# EAGLE board FinalSolarChargeSystem (EAGLE 9.3.1)
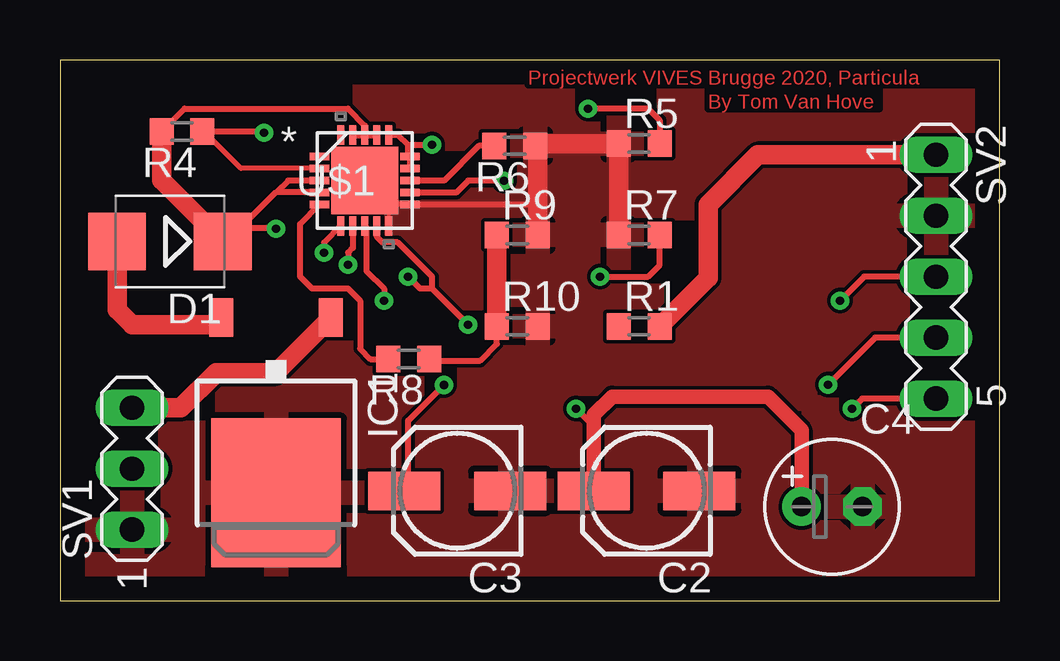
[diagram p0: board, top side]
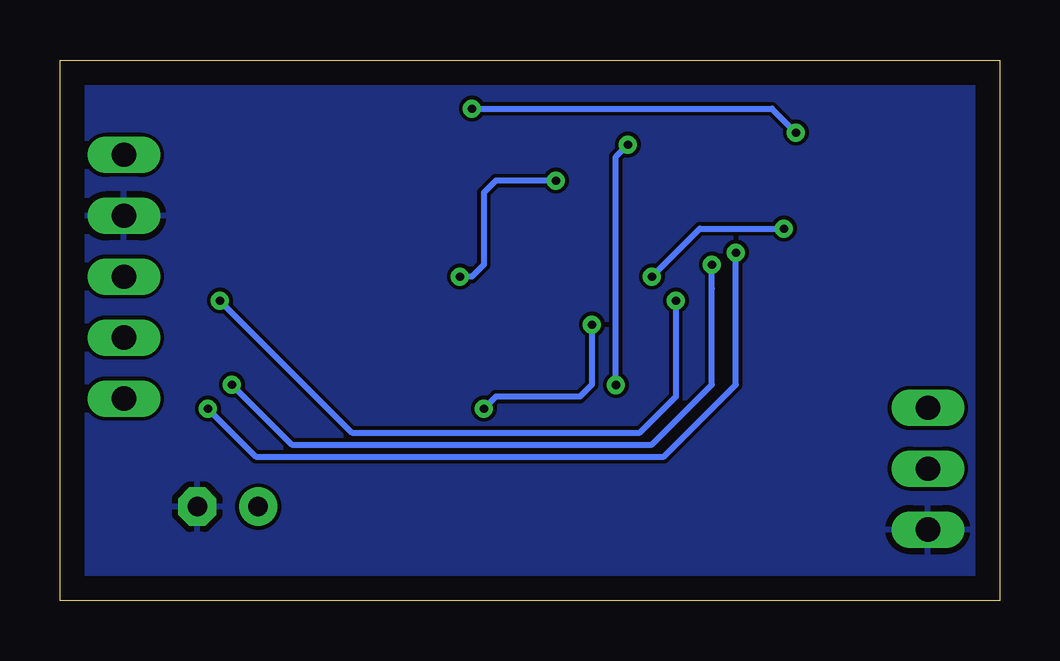
[diagram p1: board, bottom side, seen from below]

Size 39.16 x 22.53 mm. Coordinates in mm from the lower left corner, seen from the top.
Outline: 0,0 39.16,0 39.16,22.53 0,22.53 0,0
Copper layers (1*16): Top 0.035mm / dielectric 1.5mm / Bottom 0.035mm
Design rules "default": minimum track width 6mil, minimum drill 0.35mm, track to track 6mil, track to pad 6mil, pad to pad 6mil, via to via 6mil, smd to smd 6mil, copper to edge 40mil, drill to drill 6mil, minimum pad ring 10mil, minimum via ring 8mil, stop-mask expansion 4mil, vias tented up to drill 0mil, thermal gap 10mil

## Footprints (pad centres in the part's own frame; a part is rotated, then mirrored left to right if it is on the bottom)
153CLV-0505 = smd 3 x 1.6: + 2.2,0; - -2.2,0
E2,5-6 = drill 0.813 pad 1.6: + -1.27,0 | drill 0.813 pad 1.6 octagon: - 1.27,0
SMB = smd 2.4 x 2.4: A 2.2,0; C -2.2,0
TO252 = smd 1 x 1.6: 1 -2.28,-4.8; 2 2.28,-4.8 | smd 5.4 x 6.2: 3 0,2.5
R0603 = smd 1 x 1.1: 1 -0.85,0; 2 0.85,0
MA03-1 = drill 1.016 long: 1 -2.54,0; 2 0,0; 3 2.54,0
MA05-1 = drill 1.016 long: 1 -5.08,0; 2 -2.54,0; 3 0,0; 4 2.54,0; 5 5.08,0
QFN20_4X4MC = smd 0.813 x 0.305: 1 -1.892,1; 2 -1.892,0.5; 3 -1.892,0; 4 -1.892,-0.5; 5 -1.892,-1; 11 1.892,-1; 12 1.892,-0.5; 13 1.892,0; 14 1.892,0.5; 15 1.892,1 | smd 0.305 x 0.813: 6 -1,-1.892; 7 -0.5,-1.892; 8 0,-1.892; 9 0.5,-1.892; 10 1,-1.892; 16 1,1.892; 17 0.5,1.892; 18 0,1.892; 19 -0.5,1.892; 20 -1,1.892 | smd 2.794 x 2.794: 21 0,0

## Placement (x,y rotation side)
C2  10µ  [153CLV-0505]  24.44,4.58 180 top
C3  10µ  [153CLV-0505]  16.55,4.58 180 top
C4  4700µ  [E2,5-6]  32.17,3.92 0 top
D1  ES2D  [SMB]  4.58,14.97 180 top
IC1  7805DT  [TO252]  9,7 180 top
R1  330R  [R0603]  24.13,11.43 0 top
R4  270k  [R0603]  5.08,19.55 180 top
R5  100k  [R0603]  24.13,19.05 0 top
R6  2k  [R0603]  18.95,18.95 180 top
R7  100k  [R0603]  24.13,15.24 0 top
R8  1k  [R0603]  14.53,10.07 180 top
R9  10k  [R0603]  19.05,15.24 0 top
R10  150k  [R0603]  19.05,11.43 0 top
SV1  [MA03-1]  3,5.5 90 top
SV2  [MA05-1]  36.5,13.5 270 top
U$1  MCP73871_XXX_ML  [QFN20_4X4MC]  12.7,17.51 0 top

## Library data of the parts
C2-C4 = rcl; SPICEPREFIX: C
D1 = diode
IC1 = linear4
R1 R4-R10 = rcl; SPICEPREFIX: R
SV1 SV2 = con-lstb; OC_FARNELL: unknown; OC_NEWARK: unknown
U$1 = MCP73871

## Nets
GND: C2.- C3.- C4.- IC1.3 R5.1 R6.1 R7.1 R9.2 R10.2 SV1.1 SV2.2 U$1.10 U$1.11 U$1.21
N$1: R1.2 SV2.1
N$2: R1.1
N$3: IC1.1 SV1.3
N$4: D1.A IC1.2
N$5: SV2.3 U$1.8
N$6: SV2.4 U$1.7
N$7: R4.1 R5.2 U$1.2
N$8: R7.2 U$1.12
N$9: R8.1 R9.1 R10.1
N$10: R6.2 U$1.13
N$11: SV2.5 U$1.6
N$14: R8.2 U$1.5
VCC: C2.+ C4.+ D1.C R4.2 U$1.3 U$1.4 U$1.9 U$1.17 U$1.18 U$1.19
VIN: C3.+ U$1.14 U$1.15 U$1.16

## Tracks (layer width: path | path; a pad name or v marks a point on that pad's centre or on a via)
GND
  Top 0.152: U$1.10 13.7,16.51 U$1.21
  Top 0.203: U$1.11 13.7,16.51
  Top 0.254: U$1.11 14.6,16.5 19.9,16.5
  Top 0.813: R7.1 R5.1 19.9,19.05 R6.1 19.9,18.85 19.9,16.5 R9.2
  pour Top: 0,0 0,22.5 39.5,22.5 39.5,0
  pour Bottom: 0,22.5 0,0 39.5,0 39.5,22.5
  pour Bottom: 0,0 0,22.5 39.5,22.5 39.5,0
N$1
  Top 0.813: SV2.1 29.08,18.58 27,16.5 27,13.45 R1.2
N$3
  Top 0.813: SV1.3 5.04,8.04 6.5,9.5 8.98,9.5 IC1.1
N$4
  Top 0.813: D1.A 2.38,12.12 3,11.5 6.42,11.5 IC1.2
N$5  (via drill 0.35)
  Top 0.254: U$1.8 12.77,15.55 12.77,13.73 13.5,13 v13.5,12.5 | SV2.3 33.5,13.5 v32.5,12.5
  Bottom 0.254: v32.5,12.5 27,7 15,7 13.5,8.5 v13.5,12.5
N$6  (via drill 0.35)
  Top 0.254: U$1.7 12.2,14.7 12,14.5 v12,14 | SV2.4 33.96,10.96 v32,9
  Bottom 0.254: v32,9 29.5,6.5 14.5,6.5 12,9 12,13 v12,14
N$7  (via drill 0.35)
  Top 0.2: U$1.2 7.54,18.01 6,19.55
  Top 0.254: v8.5,19.5 8.45,19.55 6,19.55 R4.1 | v22,20.5 24.5,20.5 24.98,20.02 R5.2
  Bottom 0.254: v8.5,19.5 9.5,20.5 v22,20.5
N$8  (via drill 0.35)
  Top 0.254: v22.5,13.5 24.5,13.5 24.98,13.98 R7.2 | U$1.12 14.6,17 16.5,17 17,17.5 v18.5,17.5
  Bottom 0.254: v18.5,17.5 21,17.5 21.5,17 21.5,14 22,13.5 v22.5,13.5
N$9
  Top 0.254: R8.1 15.45,10 17.5,10 18.2,10.7 R10.1
  Top 0.813: R9.1 R10.1
N$10
  Top 0.254: R6.2 17.45,18.95 16,17.5 14.6,17.5 U$1.13
N$11  (via drill 0.35)
  Top 0.254: U$1.6 11,14.92 v11,14.5 | SV2.5 33.42,8.42 v33,8
  Bottom 0.254: v33,8 31,6 14,6 11,9 v11,14.5
N$14
  Top 0.254: 10.8,16.5 U$1.5 10,15.7 10,13.5 10.5,13 12,13 12.5,12.5 12.5,10.5 12.93,10.07 R8.2
VCC  (via drill 0.35)
  Top 0.254: U$1.19 U$1.18 | U$1.18 U$1.17 | R4.2 5.18,20.5 12,20.5 12.7,19.8 U$1.18 | 7.53,14.97 7,14.97 | 7,14.97 D1.C | v21.5,8 22.24,7.26 C2.+ | U$1.9 13.2,15.16 13.43,14.93 14.07,14.93 15.5,13.5 15.5,13 | U$1.4 9.01,17.01 | U$1.3 10.8,17.5 9.5,17.5 9.01,17.01 | 7.49,15.51 8.99,17.01 9.01,17.01 | 7.49,15.51 7,15.02 7,14.97 | v17,11.5 15.5,13 | 15.5,13 15,13 v14.5,13.5 | 7.5,15.5 7.49,15.51 | v9,15.5 v8.99,15.51 7.49,15.51
  Top 0.61: C2.+ 22.24,7.74 23,8.5 29.5,8.5 30.9,7.1 C4.+
  Top 0.813: R4.2 4.23,17.52 D1.C
  Bottom 0.254: v17,11.5 17,9 17.5,8.5 21,8.5 v21.5,8 | v14.5,13.5 12.5,15.5 v9,15.5
VIN  (via drill 0.35)
  Top 0.254: C3.+ 14.5,4.73 14.5,7.5 v16,9 v16,8.99 | 14.5,19 14.5,18.6 U$1.15 U$1.14 | 14.5,19 14.1,19.4 U$1.16 | 14.5,19 v15.5,19
  Bottom 0.254: v15.5,19 16,18.5 v16,8.99

## Text on the board
Top: Projectwerk VIVES Brugge 2020, Particula | By Tom Van Hove